# Altium PCB ledDriverPCB.PcbDoc
Units mm, origin at the board's own origin, x right, y up, seen from the top; angles counter-clockwise.
Board outline 63.02 x 30 mm, 2 copper layers (Top Layer, Bottom Layer); 20 components, 13 nets, 57 pads, 1 vias.
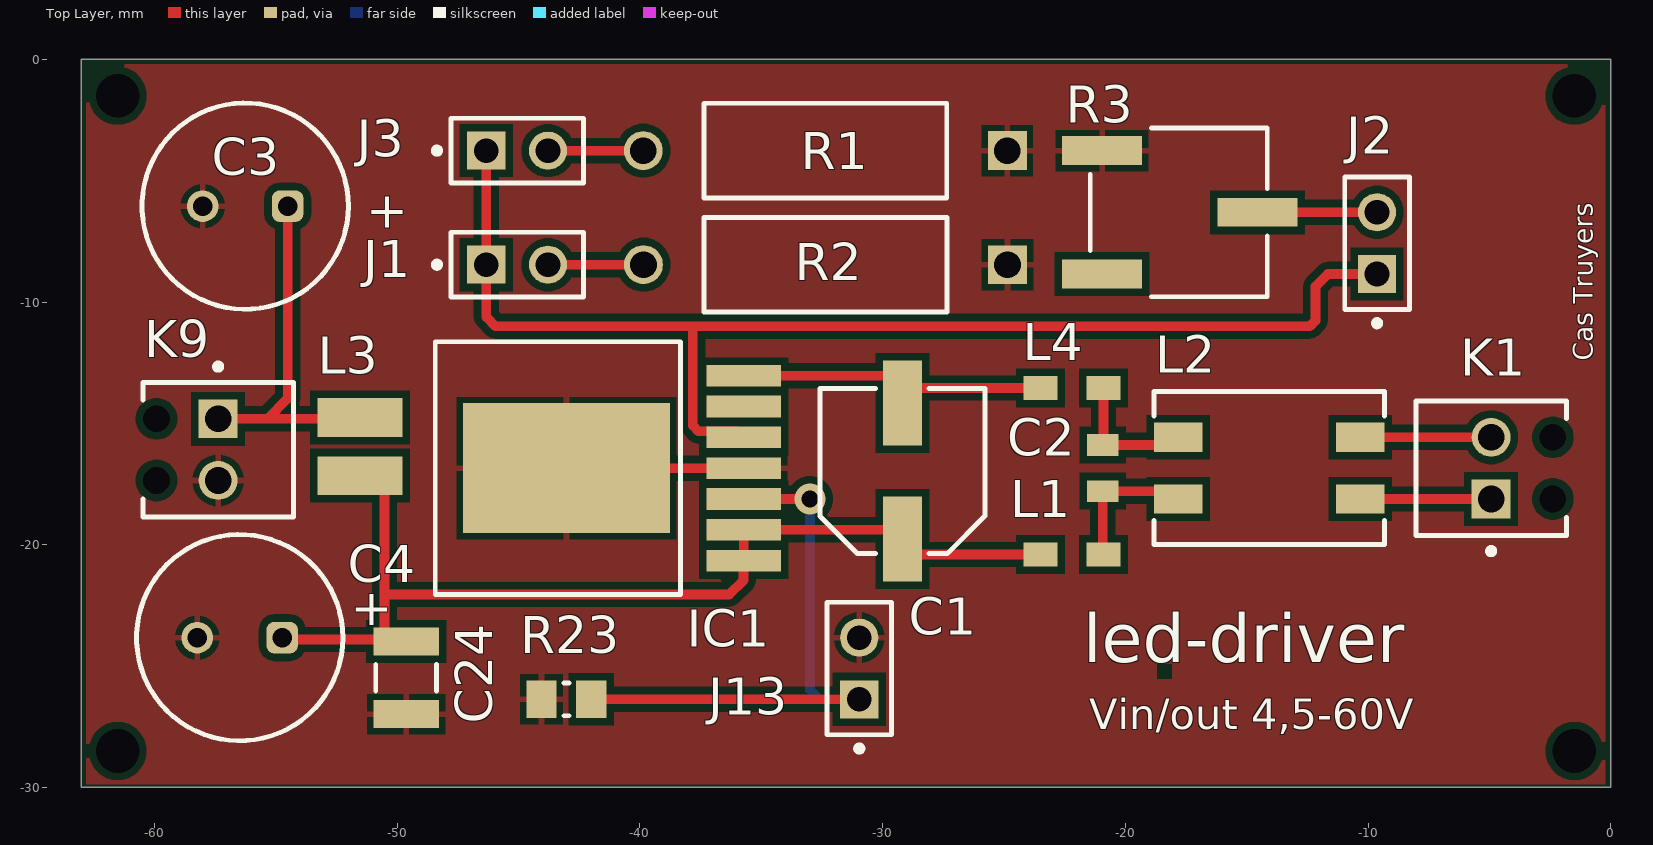
[diagram p0: Top Layer view]
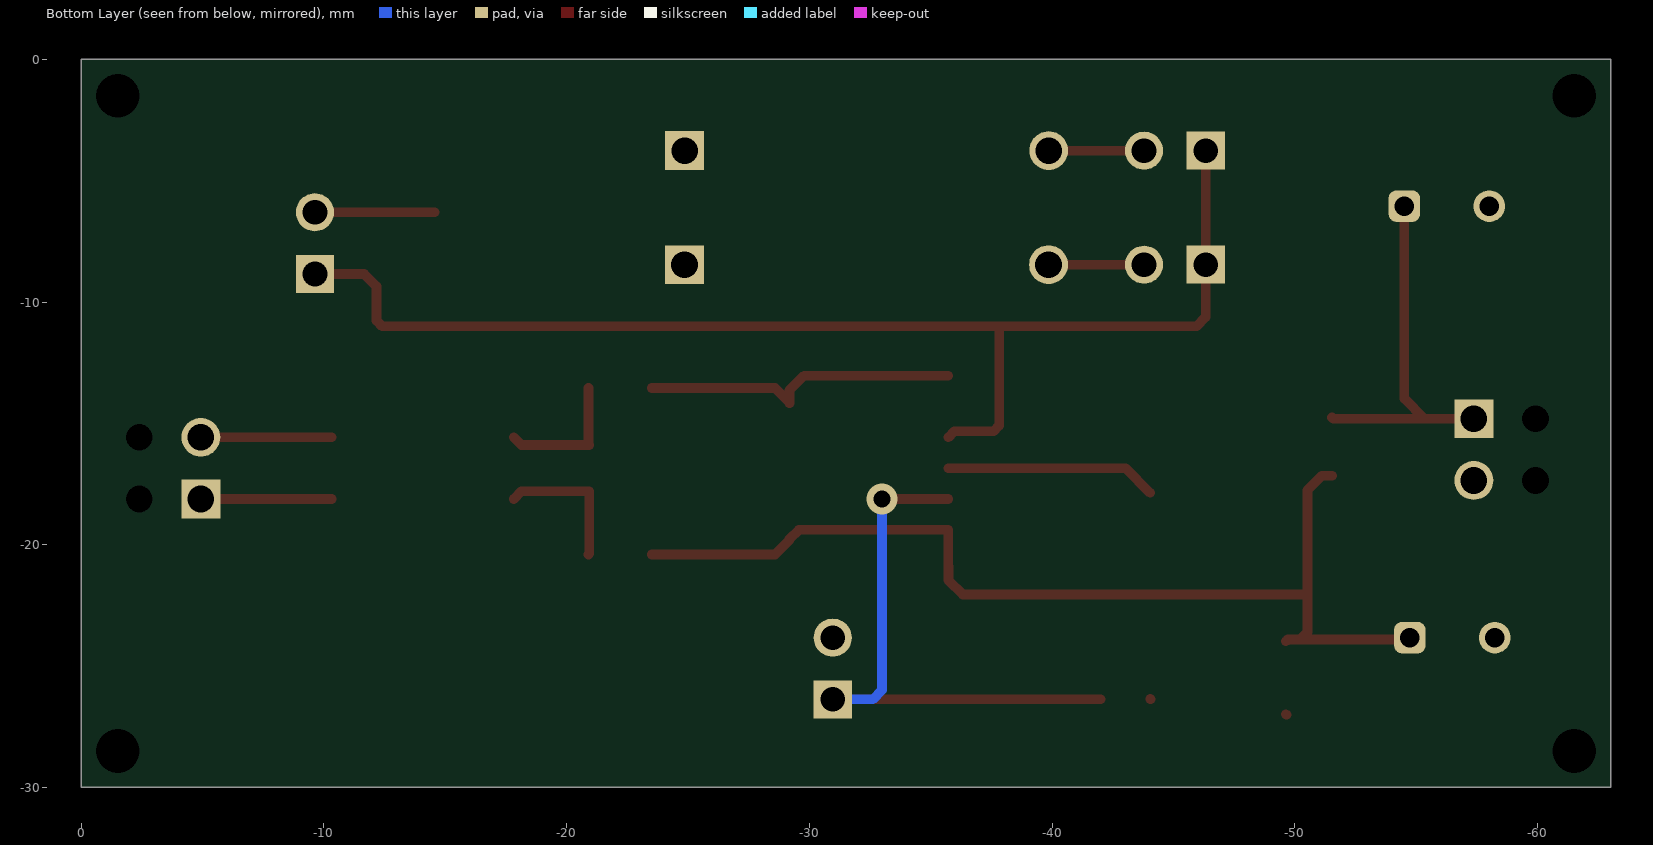
[diagram p1: Bottom Layer view, seen from below]
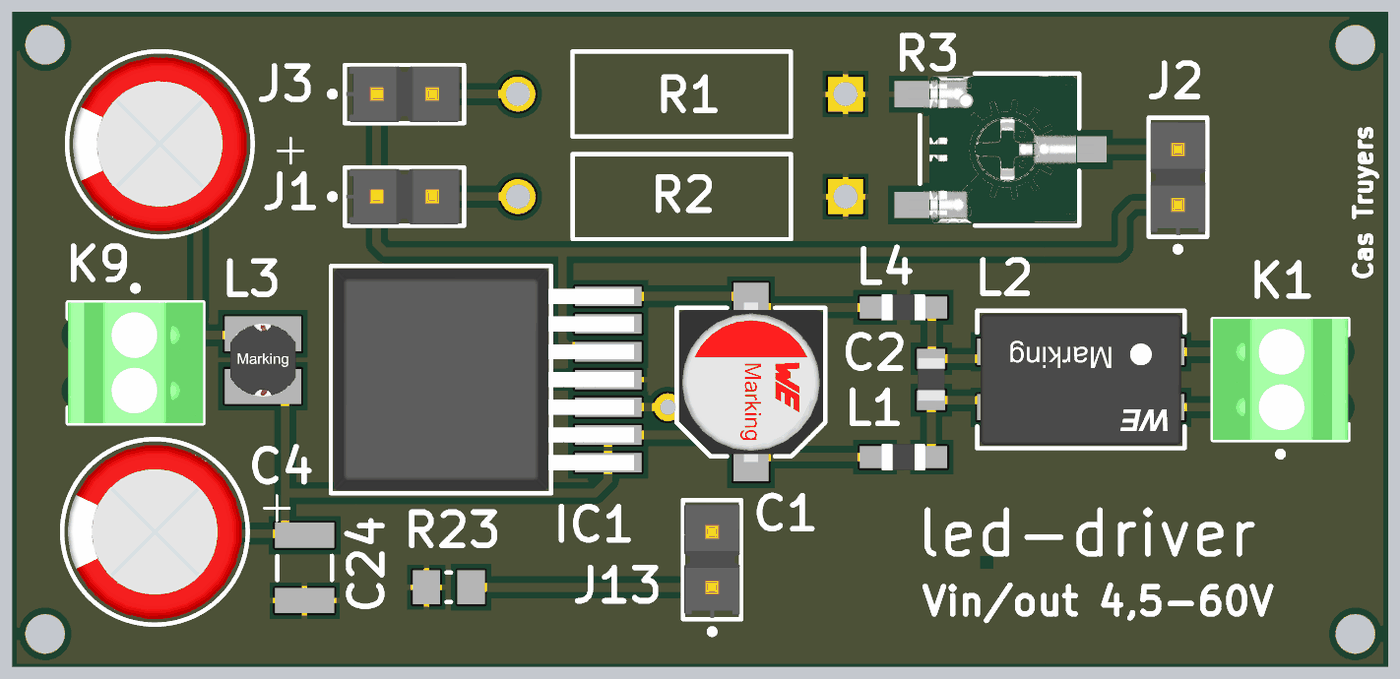
[diagram p2: 3D render of the assembled board from above, using the file's embedded part models]

## Layer stack, top to bottom
Top Solder: solder mask 0.0102, Solder Resist, Dk 3.5
Top Layer: signal copper 0.0356
Dielectric 1: dielectric 0.32, FR-4, Dk 4.8
Bottom Layer: signal copper 0.0356
Bottom Solder: solder mask 0.0102, Solder Resist, Dk 3.5

## Board outline
-63.017,-29.997 0,-29.997 0,0.006 -63.017,0.006

## Design rules (kind name [scope] priority, off if disabled: settings)
Clearance [All] p1: gap=0.3 ignorepadtopadclearanceinfootprint=FALSE except(0.127: SMDPad-SMDPad; 0.254: Arc-Via Track-Via Via-Via; 0.33: Arc-THPad Track-THPad; 0.5: THPad-THPad)
MinimumSolderMaskSliver [All] p1: minsoldermaskwidth=0.127
PolygonConnect [All] p1: connectstyle=Relief reliefconductorwidth=0.254 reliefentries=4 polygonreliefangle="90 Angle" airgapwidth=0.254
RoutingVias [All] p1: holewidth=0.711 width=1.27 viastyle="Through Hole" minholewidth=0.711 minwidth=1.27 maxholewidth=0.711 maxwidth=1.27
SilkToSolderMaskClearance [IsPad] p1: minsilkscreentomaskgap=0.127 clearancetoexposedcopper=TRUE
SolderMaskExpansion [All] p1: expansion=0.102 istentingtop=FALSE
Width [All] p1: maxlimit=0.4 minlimit=0.4 preferedwidth=0.4
28 further rules are at their usual default settings.

## Components (designator, comment, footprint, x,y, rotation, side; value= is the part's Value field where it differs from the comment)
C1 "4.7uF, 100V" WCAP-PSLP_D6.3H7.7 -29.185,-16.961 r270 top
C2 "100nF, 100V" WCAP-CSGP_0805_H=1.25mm -20.93,-16.84 r270 top
C3 "27uF" WCAP-ATUL_D8H11.5 -56.264,-6.045 r0 top
C4 "27uF" WCAP-ATUL_D8H11.5 -56.49,-23.825 r0 top
C24 "2.2uF" CAPC1210(3225)280_N -49.632,-25.476 r90 top
IC1 "4.5-60Vin, 0.45Aout" 172946001 -43.383,-16.84 r180 top
J1 "" FP-TSW-102-07-G-S-MFG -45.06,-8.458 r0 top
J2 "" FP-TSW-102-07-G-S-MFG -9.627,-7.569 r90 top
J3 "" FP-TSW-102-07-G-S-MFG -45.06,-3.759 r0 top
J13 "" FP-TSW-102-07-G-S-MFG -30.963,-25.095 r90 top
K1 "1725656" PHOE-1725656-2 -4.928,-16.84 r90 top
K9 "1725656" PHOE-1725656-2 -57.379,-16.078 r270 top
L1 "1500Ohm, 1A" "WE-CBF_0805_High Current" -22.2,-20.396 r0 top
L2 "10uH" WE-SL2 -14.072,-16.84 r180 top
L3 "10uH, 0.8A" WE-PD2_3521 -51.537,-15.951 r0 top
L4 "1500Ohm, 1A" "WE-CBF_0805_High Current" -22.2,-13.538 r0 top
R1 "unknown" VISH-A1-2_V2 -32.36,-3.759 r180 top
R2 "unknown" VISH-A1-2_V2 -32.353,-8.458 r180 top
R3 "variable" FP-3361P-MFG -17.755,-6.299 r270 top value=5kΩ
R23 "1K" RESC2013X60X30ML20T20 -43.028,-26.365 r0 top

## Footprints (in the part's own frame and the unit in brackets; to place one, negate y for a bottom-side part, rotate by r counter-clockwise, add the part's x,y. Pads: shape width x height; smd on the part's side, far side on the other; paste and mask are expansions set on the pad)
172946001 [mm] "SMD, 7-Leads, Body 10.4x10.1mm (max), Pitch 1.27mm, IPC Medium Density"
  rect 3.06x0.89 smd: 1(-7.66,3.81) 2(-7.66,2.54) 3(-7.66,1.27) 4(-7.66,0) 5(-7.66,-1.27) 6(-7.66,-2.54) 7(-7.66,-3.81)
  rect 8.54x5.35 smd paste-403.566: EP(-0.355,0)
  silkscreen extent -5.05,-5.21 5.05,5.21, body extent -8.84,-5.08 4.93,5.08, height 4.77
CAPC1210(3225)280_N [mm] "Chip Capacitor, Body 3.2x2.5mm, Height 2.8mm, IPC Medium Density"
  rect 1.15x2.7 smd: 1(-1.5,0) 2(1.5,0)
  silkscreen extent -0.55,-1.25 0.55,1.25, body extent -1.7,-1.4 1.7,1.4, height 2.8
FP-3361P-MFG [mm]
  rect 1.19x3.3 smd paste+0 mask+0: 1(-2.54,-3.2) 2(0,3.2) 3(2.54,-3.2)
  silkscreen extent -3.48,-3.69 3.48,3.6, body extent -3.58,-4.95 3.58,4.95, height 0.25
FP-TSW-102-07-G-S-MFG [mm]
  rect 1.57x1.57 hole 1.02 paste-1000 mask+0: 1(-1.27,0)
  round 1.57 hole 1.02 paste-1000 mask+0: 2(1.27,0)
  silkscreen extent -3.42,-1.34 2.73,1.34, body extent -2.83,-1.44 2.83,1.44, height 0.25
PHOE-1725656-2 [mm] "Connector, 2-Leads, Body 6.2x5.4mm, Pitch 2.54mm"
  rect 1.6x1.6 hole 1.1: 1(-1.27,0)
  round 1.6 hole 1.1: 2(1.27,0)
  round 0 hole 1.1 unplated: MH1(-1.27,-2.54) MH2(1.27,-2.54)
  silkscreen extent -3.54,-3.1 2.77,3.1, body extent -2.77,-3.1 2.77,3.1, height 9
RESC2013X60X30ML20T20 [mm] "Chip Resistor, 2-Leads, Body 2.00x1.25mm, IPC Low Density"
  rect 1.25x1.55 smd: 1(-1.025,0) 2(1.025,0)
  silkscreen extent -0.1,-0.67 0.1,0.67, body extent -1.1,-0.72 1.1,0.72, height 0.6
VISH-A1-2_V2 [mm] "Through Hole, 2-Leads, Dia 3.9mm, Body Length 10mm, Pin Spacing 15mm"
  rect 1.6x1.6 hole 1.1: 1(-7.5,0)
  round 1.6 hole 1.1: 2(7.5,0)
  silkscreen extent -5,-1.95 5,1.95, body extent -7.91,-1.95 7.92,1.95, height 3.88
WCAP-ATUL_D8H11.5 [mm] "Aluminum Electrolytic Capacitors, 8x11.5mm"
  rrect50% 1.3x1.3 hole 0.8: 1(1.75,0)
  round 1.3 hole 0.8: 2(-1.75,0)
  silkscreen extent -4.25,-4.25 4.25,4.25, body extent -3.99,-4 4,4, height 11.81
WCAP-CSGP_0805_H=1.25mm [mm] "Ceramic Capacitors, body 2x1.25mm"
  rect 0.9x1.3 smd: 1(-0.95,0) 2(0.95,0)
  body extent -1,-0.62 1,0.63, height 1.25
WCAP-PSLP_D6.3H7.7 [mm] "Aluminum Polymer Capacitors, body diameter 6.3mm"
  rect 3.5x1.6 smd: 1(2.8,0) 2(-2.8,0)
  silkscreen extent -3.4,-3.4 3.4,3.4, body extent -3.65,-3.3 3.65,3.3, height 7.7
"WE-CBF_0805_High Current" [mm] "SMD EMI Suppression Ferrite  Bead, body 2x1.2mm"
  rect 1.4x1 smd: 1(-1.3,0) 2(1.3,0)
  body extent -1,-0.6 1,0.6, height 0.9
WE-PD2_3521 [mm] "SMD Power Inductor, 2-Leads, body 3x3.5mm"
  rect 3.5x1.6 smd: 1(0,1.2) 2(0,-1.2)
  body extent -1.5,-1.68 1.5,1.68, height 2.12
WE-SL2 [mm] "SMD Inductor, 4-Leads, Body 9.2x6mm"
  rect 2x1.2 smd: 1(-3.75,1.27) 2(-3.75,-1.27) 3(3.75,-1.27) 4(3.75,1.27)
  silkscreen extent -4.75,-3.15 4.75,3.15, body extent -4.6,-3 4.6,3, height 5

## Part data
C1: library part 875105945001, "WCAP-PSLP Aluminum Polymer Capacitor, V-Chip, SMT, D6.3xH7.7mm, 4.7uF, 100V", Capacitance=4.7uF, Capacitance Tolerance=+/-20%, Leakage Current=600uA, Manufacturer="Wurth Elektronik", Operating Temperature="-55 to +105degC", Rated Voltage=100VDC, Ripple Current=1060mA, ComponentLink1Description=Manufacturer, ComponentLink1URL=http://www.we-online.de, ComponentLink2Description=Datasheet, ComponentLink2URL=https://www.we-online.com/catalog/datasheet/875105945001.pdf, Diameter=6.3mm, Dissipation Factor=12%, Endurance=2000h, ESR=100mOhm, Height=7.7mm, Manufacturer Part Number=875105945001, Mounting Technology=SMT, Packaging="Tape and Reel", Published Date="October 2020", Technical Reference=PSED0774R7M100DVCTCB000
C2: library part 885012207128, "WCAP-CSGP Multilayer Ceramic Chip Capacitor, General Purpose, size 0805, X7R, 100nF, 100V", Capacitance=100nF, Capacitance Tolerance=+/-10%, Isolation Resistance=>=1GOhm, Manufacturer="Wurth Elektronik", Operating Temperature="-55 to +125degC", Rated Voltage=100VDC, Ceramic Type=X7R, ComponentLink1Description=Manufacturer, ComponentLink1URL=http://www.we-online.de, ComponentLink2Description=Datasheet, ComponentLink2URL=https://www.we-online.com/catalog/datasheet/885012207128.pdf, Dissipation Factor=#NAME?, Height=1.25mm, Manufacturer Part Number=885012207128, Mounting Technology=SMT, Packaging="Tape and Reel", Published Date="May 2020", Size=0805, Technical Reference=X7R0805104K100DFCT10000
C3 C4: library part 860040874001, "WCAP-ATUL Aluminum Electrolytic Capacitor, Radial, THT, D8xH11.5mm, 27uF, 100V", Capacitance Tolerance=+/-20%, Leakage Current=27uA, Manufacturer="Wurth Elektronik", Operating Temperature="-40 to +105degC", Rated Voltage=100VDC, Ripple Current=300mA, Capacitance=27uF, ComponentLink1Description=Manufacturer, ComponentLink1URL=http://www.we-online.de, ComponentLink2Description=Datasheet, ComponentLink2URL=https://www.we-online.com/catalog/datasheet/860040874001.pdf, Diameter=8mm, Dissipation Factor=9%, Endurance=7000h, Height=11.5mm, Manufacturer Part Number=860040874001, Mounting Technology=THT, Packaging="Ammo Pack", Published Date="October 2020", Technical Reference=ATDE115270M100DSPA7G000
C24: library part CMP-1038-02104-1, "CAP 2.2uF 100V ±10% 1210 (3225 Metric) Thickness 2.8mm SMD", Case-EIA=1210, Case-Metric=3225, Rated Voltage="100 V", Tolerance=Â±10%, Max Thickness="2.8 mm", Technology=SMT
IC1: library part 172946001, "MagI3C-LDHM LED Step Down High Current Module, TO263-7EP, 4.5-60Vin, 0.45Aout", Input Voltage=4.5-60V, Operating Temperature="-40 to +125degC", Output Current=0.45A, ComponentLink1Description=Manufacturer, ComponentLink1URL=http://www.we-online.de, ComponentLink2Description=Datasheet, ComponentLink2URL=https://katalog.we-online.de/pm/datasheet/172946001.pdf, Mounting Technology=SMT, Output Voltage=4.5-60V, Packaging="Tape and Reel", Part Number=172946001, Published Date="October 2019", Publisher="Wurth Elektronik", Size=TO263-7EP
J1 J2 J3 J13: library part CMP-02766-000084-1, "CONN HEADER VERT 2POS 2.54MM", Current Rating=6.3A, Manufacturer=Samtec, Manufacturer Part Number=TSW-102-07-G-S, Temperature="-55°C to +125°C", Temperature Range High=+125°C, Temperature Range Low=-55°C, Voltage Rating=550V, Automotive=No, Category=Conn, ComponentLink2Description=Datasheet, ComponentLink2URL=http://suddendocs.samtec.com/catalog_english/tsw_th.pdf, Conn Gender=Male, Conn Orientation=Straight, Contact Material=Gold,Nickel, Device Class L1=Connectors, Device Class L2="Headers and Wire Housings", Device Class L3=unset, Digikey Description="CONN HEADER VERT 2POS 2.54MM", Footprint Url=http://suddendocs.samtec.com/prints/tsw-xxx-xx-x-x-xx-xxx-footprint.pdf, Height=8.71mm, Lead Free=Yes, Mouser Description="Conn Unshrouded Header HDR 2 POS 2.54mm Solder ST Thru-Hole Automotive Bulk", Number Of Contacts=2, Number Of Rows=1, Octopart=https://octopart.com/tsw-102-07-g-s-samtec-272197, Package=TSW-102-07-G-S, Pitch=2.54mm, RoHS=TRUE
K1 K9: library part CMP-2000-05299-1, "Male Header, Pitch 2.54 mm, 1 x 2 Position, Height 9 mm, Tail Length 3.5 mm", Colour=Green, Manufacturer="Phoenix Contact", Content=250pc(s), Datasheet URL=http://datasheet.octopart.com/1725656-Phoenix-Contact-datasheet-5302866.pdf, Datasheet Version=Apr-08, Industrial packaging=Yes, Manufacturer part No.=1725656, Manufacturer URL=http://www.phoenixcontact.com/, Number Of Contacts=2, Pitch=2.54mm, Type=MPT0,5/2-2,54
L1 L4: library part 742792097, "WE-CBF SMT EMI Suppression Ferrite Bead, size 0805, 1500Ohm, 1A", DC Resistance max.=0.3Ohm, Manufacturer="Wurth Elektronik", Operating Temperature="-55 to +125degC", Rated Current=1A, ComponentLink1Description=Manufacturer, ComponentLink1URL=http://www.we-online.de, ComponentLink2Description=Datasheet, ComponentLink2URL=https://www.we-online.com/catalog/datasheet/742792097.pdf, Impedance @100MHz=1500Ohm, Impedance max.=1800Ohm, Manufacturer Part Number=742792097, Mounting Technology=SMT, Packaging="Tape and Reel", Published Date="March 2020", Size=0805, Type="High Current"
L2: library part 744226S, "WE-SL2 SMT Common Mode Line Filter, 10uH, 1.6A, 80V", DC Resistance max.=0.08Ohm, Insulation Test Voltage=500VAC, Manufacturer="Wurth Elektronik", Operating Temperature="-40 to +125degC", Rated Current=1.6A, Rated Voltage=80V, ComponentLink1Description=Manufacturer, ComponentLink1URL=http://www.we-online.de, ComponentLink2Description=Datasheet, ComponentLink2URL=https://www.we-online.com/catalog/datasheet/744226S.pdf, Impedance max.=920Ohm, Inductance=10uH, Manufacturer Part Number=744226S, Mounting Technology=SMT, Packaging="Tape and Reel", Published Date="April 2020", Winding Style=sectional
L3: library part 7447732110, "WE-PD2 SMT Power Inductor, size 3521, 10uH, 0.8A", DC Resistance max.=0.3Ohm, DC Resistance typ.=0.237Ohm, Inductance=10uH, Manufacturer="Wurth Elektronik", Operating Temperature="-40 to +125degC", Rated Current=0.8A, Saturation Current=1.23A, Self Resonant Frequency=45MHz, ComponentLink1Description=Manufacturer, ComponentLink1URL=http://www.we-online.de, ComponentLink2Description=Datasheet, ComponentLink2URL=https://www.we-online.com/catalog/datasheet/7447732110.pdf, Manufacturer Part Number=7447732110, Mounting Technology=SMT, Packaging="Tape and Reel", Published Date="April 2020", Size=3521
R1 R2: library part CMP-1240-00001-1, "Power Metal Film Leaded Resistor, 62 KOhm +/-5%, 2 W, 2-Pin THD, RoHS, Ammo Pack", Manufacturer="Vishay Semiconductor", PartNumber=PR02000206202JA100, Power="2 W", Resistance="62 KOhm", Temperature Coefficient="+/-250 ppm/degC", Tolerance=+/-5%, ComponentLink1Description="Manufacturer URL", ComponentLink1URL=http://www.vishay.com/, ComponentLink2Description=Datasheet, ComponentLink2URL=http://www.vishay.com/docs/28729/28729.pdf, ComponentLink3Description="Package Specification", ComponentLink3URL=http://www.vishay.com/docs/28729/28729.pdf, DatasheetVersion=Jun-13, Mounting Technology="Through Hole", PackageDescription="2-Pin Axial Lead, Body 10 x 3.9 mm", Packing="Ammo Pack", RoHS=TRUE
R3: library part CMP-07234-000005-1, "TRIMMER 5K OHM 0.5W GW TOP ADJ", Manufacturer=Bourns, Manufacturer Part Number=3361P-1-502GLF, Package=3361P, Power Rating=0.5W, Resistance=5kΩ, Temperature="-55°C to +125°C", Temperature Coefficient=100ppm/°C, Temperature Range High=+125°C, Temperature Range Low=-55°C, Tolerance=10%, Voltage Rating=300V, Automotive=No, Category=Res, ComponentLink2Description=Datasheet, ComponentLink2URL=https://www.bourns.com/docs/product-datasheets/3361.pdf?sfvrsn=3426000b_8, Composition=Cermet, Device Class L1="Passive Components", Device Class L2=Resistors, Device Class L3="Variable Resistors and Potentiometers", Digikey Description="TRIMMER 5K OHM 0.5W GW TOP ADJ", Height=5.84mm, Lead Free=Yes, Mouser Description="Trimmer Resistors - SMD 1/4\" SQ 5K 10% 0.5WATTS", Octopart=https://octopart.com/3361p-1-502glf-bourns-92301, RoHS=TRUE, Series=3361
R23: library part CMP-2001-04656-1, Manufacturer="KOA Speer", Part Number=RK73B2ATTD102J

## Free pads (board coordinates)
  round 1.524 hole 1.8: 1(-61.519,-1.499) 2(-61.519,-28.499) 3(-1.499,-1.499) 4(-1.499,-28.499)

## Via types
v1: diameter 1.27, hole 0.711, Top Layer to Bottom Layer, 1 vias

## Nets (pads, with @x,y where several pads share a name; then routed paths per layer and width w, separated by ;. In a path a pad name is that pad's centre, name@x,y a point inside that pad or via, vN(x,y) a via of type N, cw(c..) or ccw(c..) an arc to the next point about the centre after c; other vN are vias at no path point)
GND: C3.2 C4.2 C24.1 IC1.4 IC1.EP J13.2 K9.2 R1.1 R2.1 R3.1 R23.1 | length 8.9
  Top Layer w0.4: C4.2@-58.268,-23.797 C4.2 ; C24.1@-49.656,-27 C24.1 ; R23.1 R23.1@-44.044,-26.356 ; IC1.EP@-44.044,-17.856 IC1.EP IC1.4 ; J13.2@-31.026,-23.889 J13.2 ; R2.1@-24.86,-8.451 R2.1
NetC1_1: C1.1 C4.1 C24.2 IC1.1 IC1.2 L1.1 L3.2 | length 42.5
  Top Layer w0.4: C4.1 -54.664,-23.901 C24.2@-50.221,-23.901 ; L3.2 -51.121,-17.151 -50.521,-17.751 -50.521,-22.047 ; C24.2 -49.707,-23.901 C24.2@-50.221,-23.901 ; L1.1 -28.585,-20.396 -29.185,-19.796 C1.1 -29.566,-19.38 IC1.2 -35.723,-20.882 -35.736,-20.895 -35.736,-21.461 -36.322,-22.047 -50.521,-22.047 ; -50.521,-22.047 -50.521,-23.601 C24.2@-50.221,-23.901
NetC1_2: C1.2 IC1.7 L4.1 | length 13.3
  Top Layer w0.4: IC1.7 -29.785,-13.03 -29.185,-13.63 C1.2@-29.185,-14.138 ; C1.2 C1.2@-29.185,-14.138 ; L4.1 -28.585,-13.538 C1.2@-29.185,-14.138
NetC2_1: C2.1 L2.3 L4.2 | length 5.6
  Top Layer w0.4: L4.2 -20.9,-15.86 C2.1 -18.142,-15.89 L2.3
NetC2_2: C2.2 L1.2 L2.4 | length 5.9
  Top Layer w0.4: L1.2 -20.93,-20.366 C2.2 -18.142,-17.79 L2.4
NetC3_1: C3.1 K9.1 L3.1 | length 15
  Top Layer w0.4: K9.1 -55.347,-14.808 ; C3.1 -54.514,-13.975 -55.347,-14.808 ; L3.1 -51.594,-14.808 -55.347,-14.808
NetIC1_3: IC1.3 J13.1 R23.2 | length 23.8
  Top Layer w0.4: R23.2 J13.1 ; IC1.3 v1(-32.995,-18.11)
  Bottom Layer w0.4: v1(-32.995,-18.11) -32.995,-25.984 -32.614,-26.365 J13.1
NetIC1_5: IC1.5 J1.1 J2.1 J3.1 | length 51.8
  Top Layer w0.4: J3.1 J1.1 -46.33,-10.617 -45.949,-10.998 -37.821,-10.998 ; IC1.5 -35.968,-15.325 -37.586,-15.325 -37.821,-15.091 -37.821,-10.998 ; J2.1 -11.659,-8.839 -12.167,-9.347 -12.167,-10.764 -12.401,-10.998 -37.821,-10.998
NetJ1_2: J1.2 R2.2 | length 3.9
  Top Layer w0.4: J1.2 R2.2
NetJ2_2: J2.2 R3.2 | length 4.9
  Top Layer w0.4: R3.2 J2.2
NetJ3_2: J3.2 R1.2 | length 4.1
  Top Layer w0.4: J3.2 R1.2@-39.733,-3.759
NetK1_1: K1.1 L2.1 | length 5.4
  Top Layer w0.4: L2.1 K1.1
NetK1_2: K1.2 L2.2 | length 5.4
  Top Layer w0.4: L2.2 K1.2
pads on no net: IC1.6 K1.MH1 K1.MH2 K9.MH1 K9.MH2 R3.3

## Polygon pours and split planes (outlines as drawn)
GND on Top Layer "GND_L01_P001" (solid, remove dead copper, pour order 1): -0.229,-0.203 -0.229,-29.87 -62.814,-29.87 -62.814,-0.203

## Other copper
Top Layer:

## Silkscreen, mask and mechanical layers (free items; w line width, h text height)
Top Overlay:
  text "Cas Truyers" at -0.749,-12.421 h0.8 r90
  text "led-driver" at -21.742,-24.841 h2
  text "Vin/out 4,5-60V" at -21.488,-27.598 h1.25
boardOutline:
  lines w0.254: -63.017,-29.997 -63.017,0.025 0.025,0.025 0.025,-29.997 -63.017,-29.997

## Text inside footprints (layer, text, board x,y; h text height)
C3: Top Overlay "+" at -51.283,-6.934 h1.5
C4: Top Overlay "+" at -51.918,-23.317 h1.5